# EAGLE board trill-square (EAGLE 6.5.0), part 1 of 2
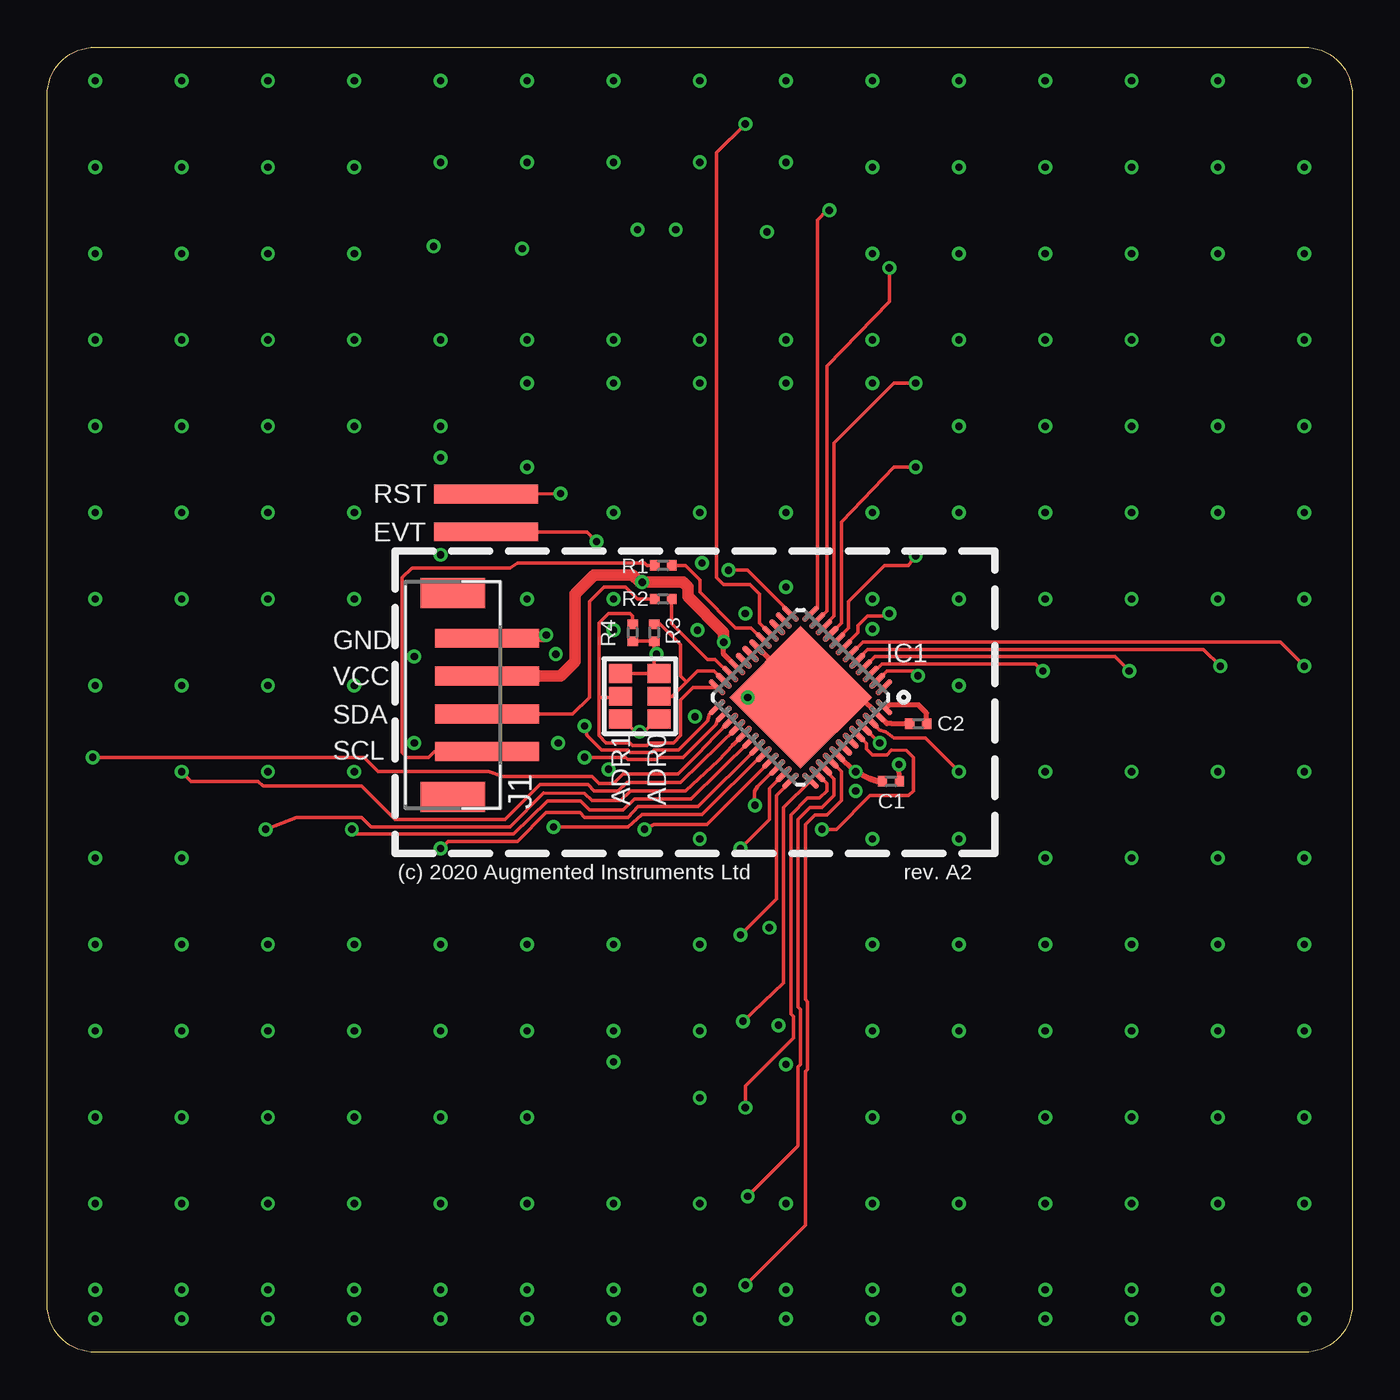
[diagram p0: board, top side]
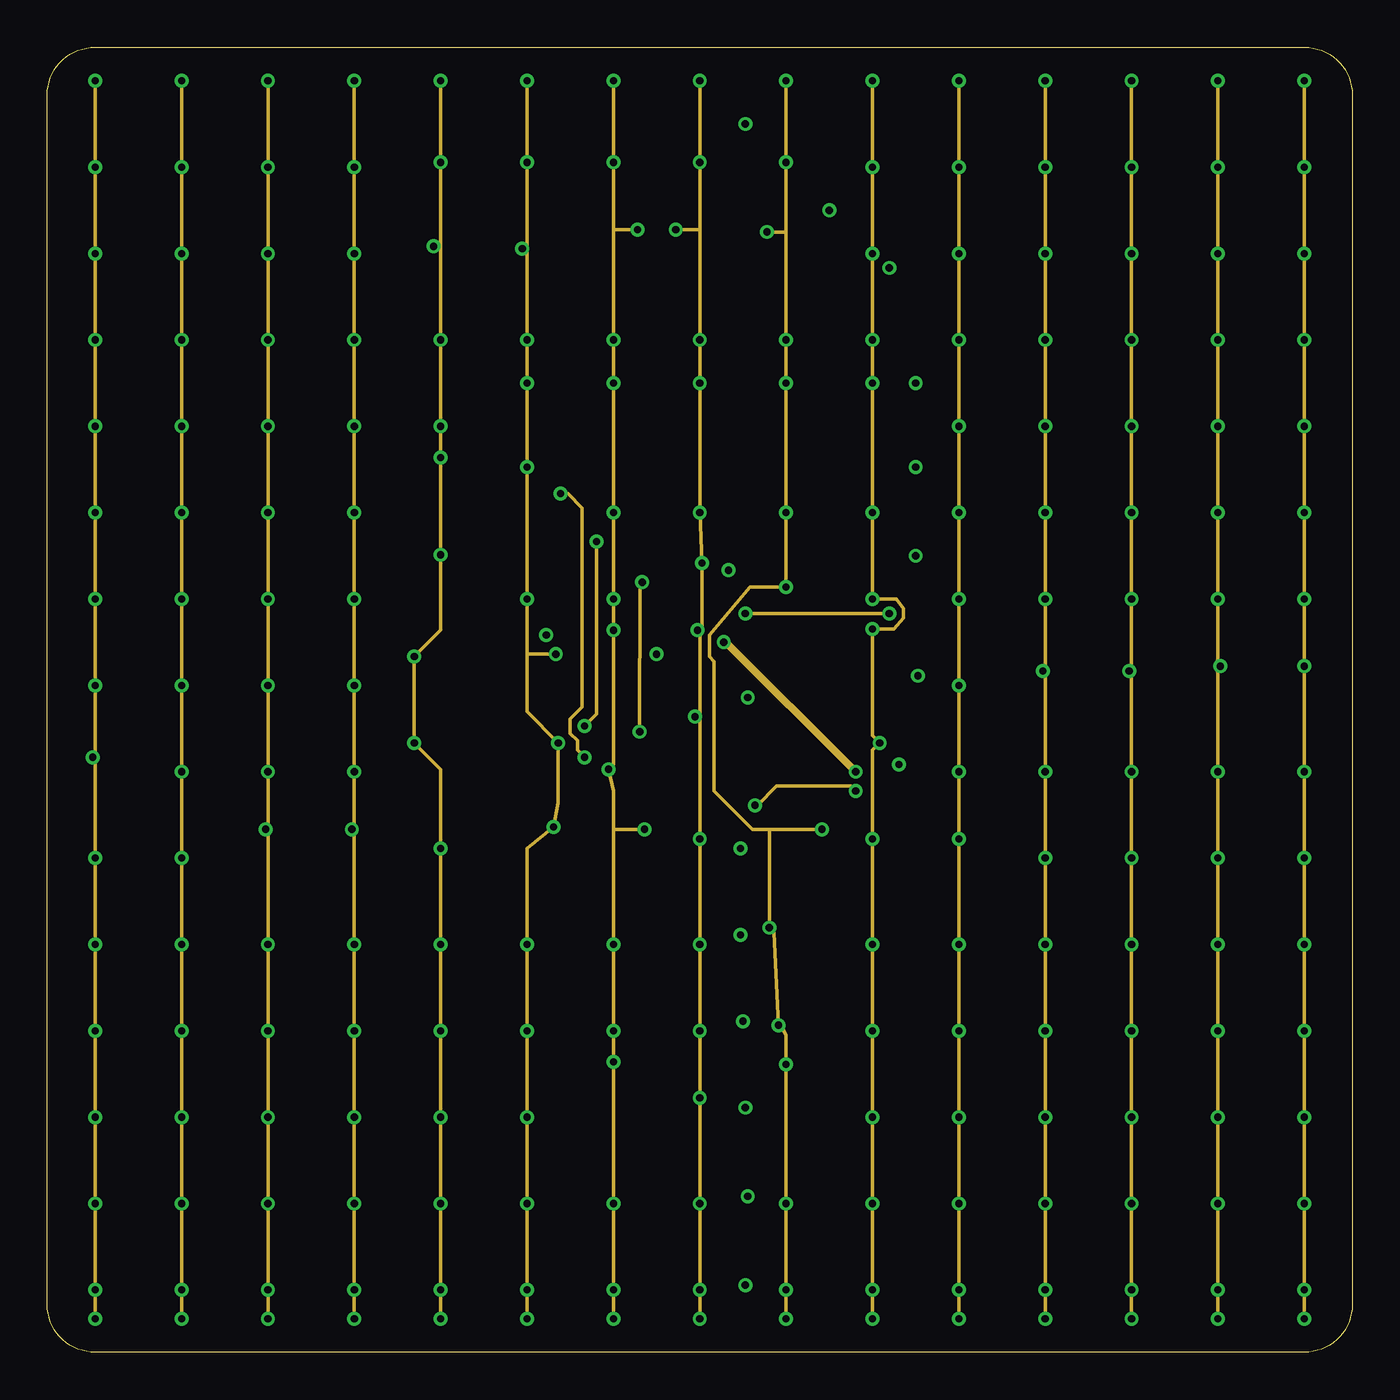
[diagram p1: board, inner layer Route2]
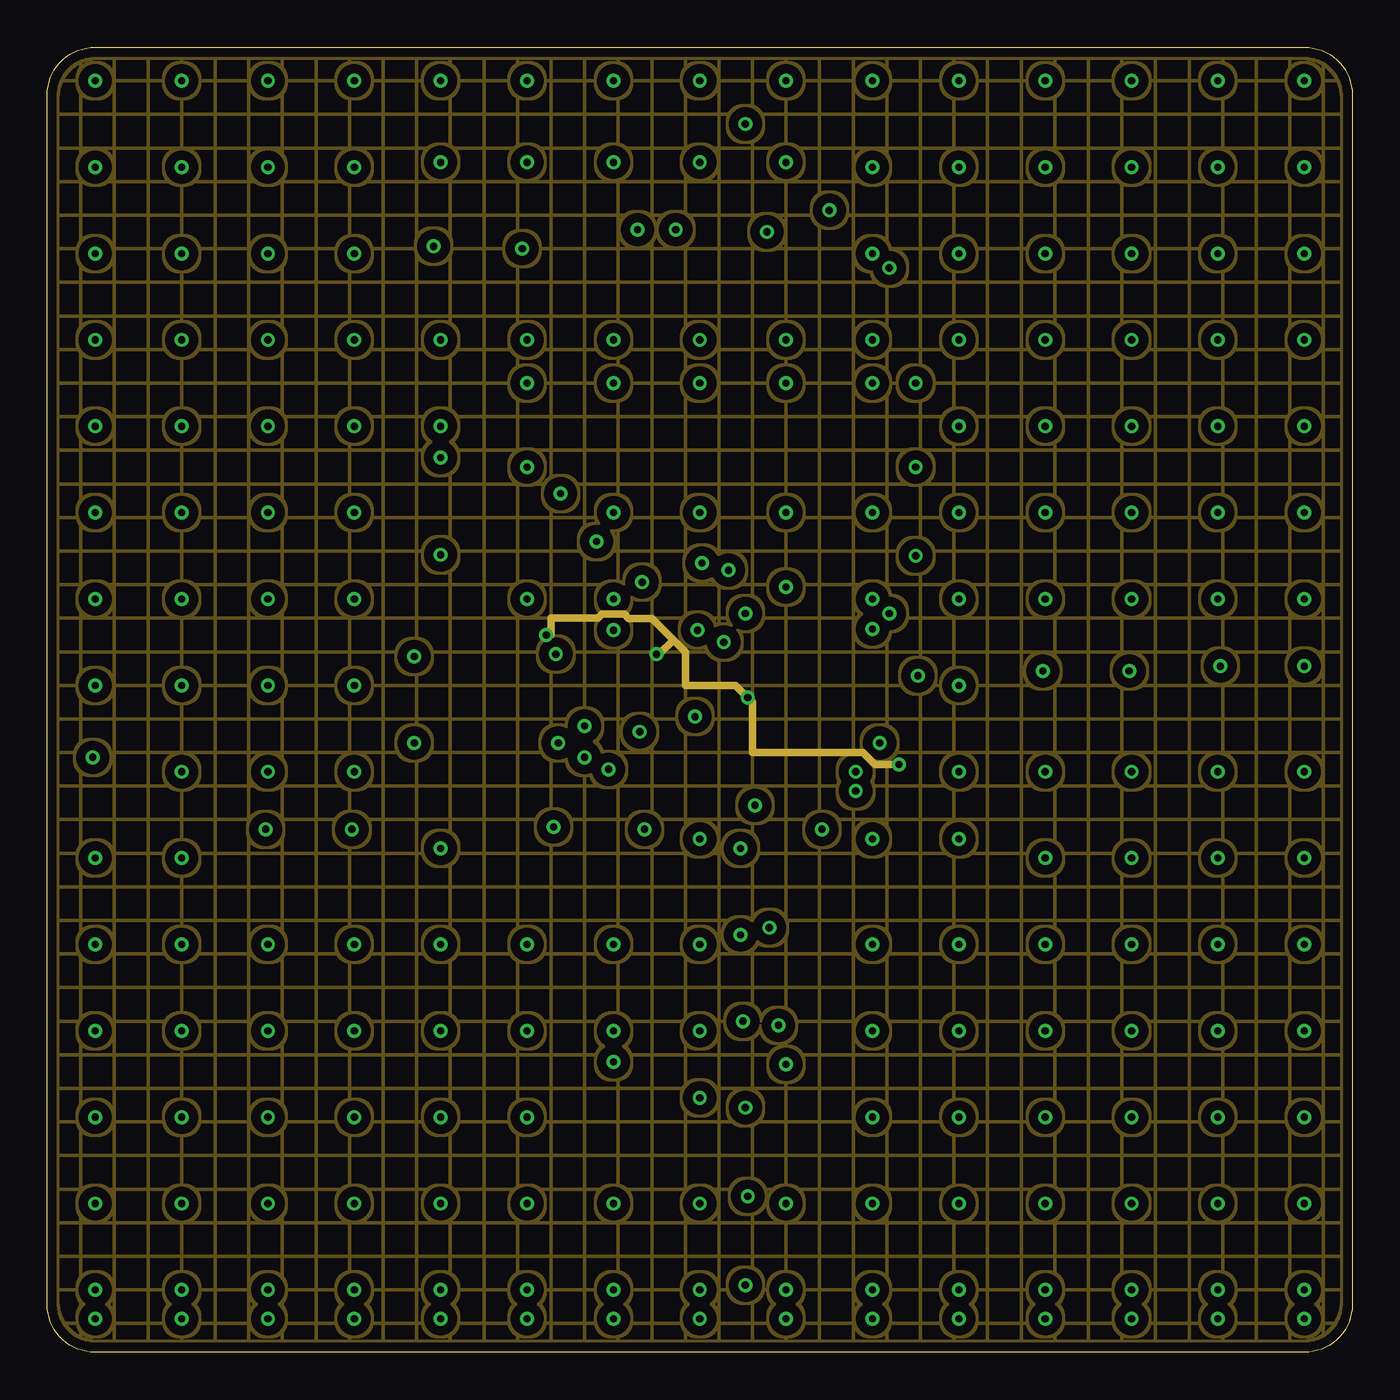
[diagram p2: board, inner layer Route3]
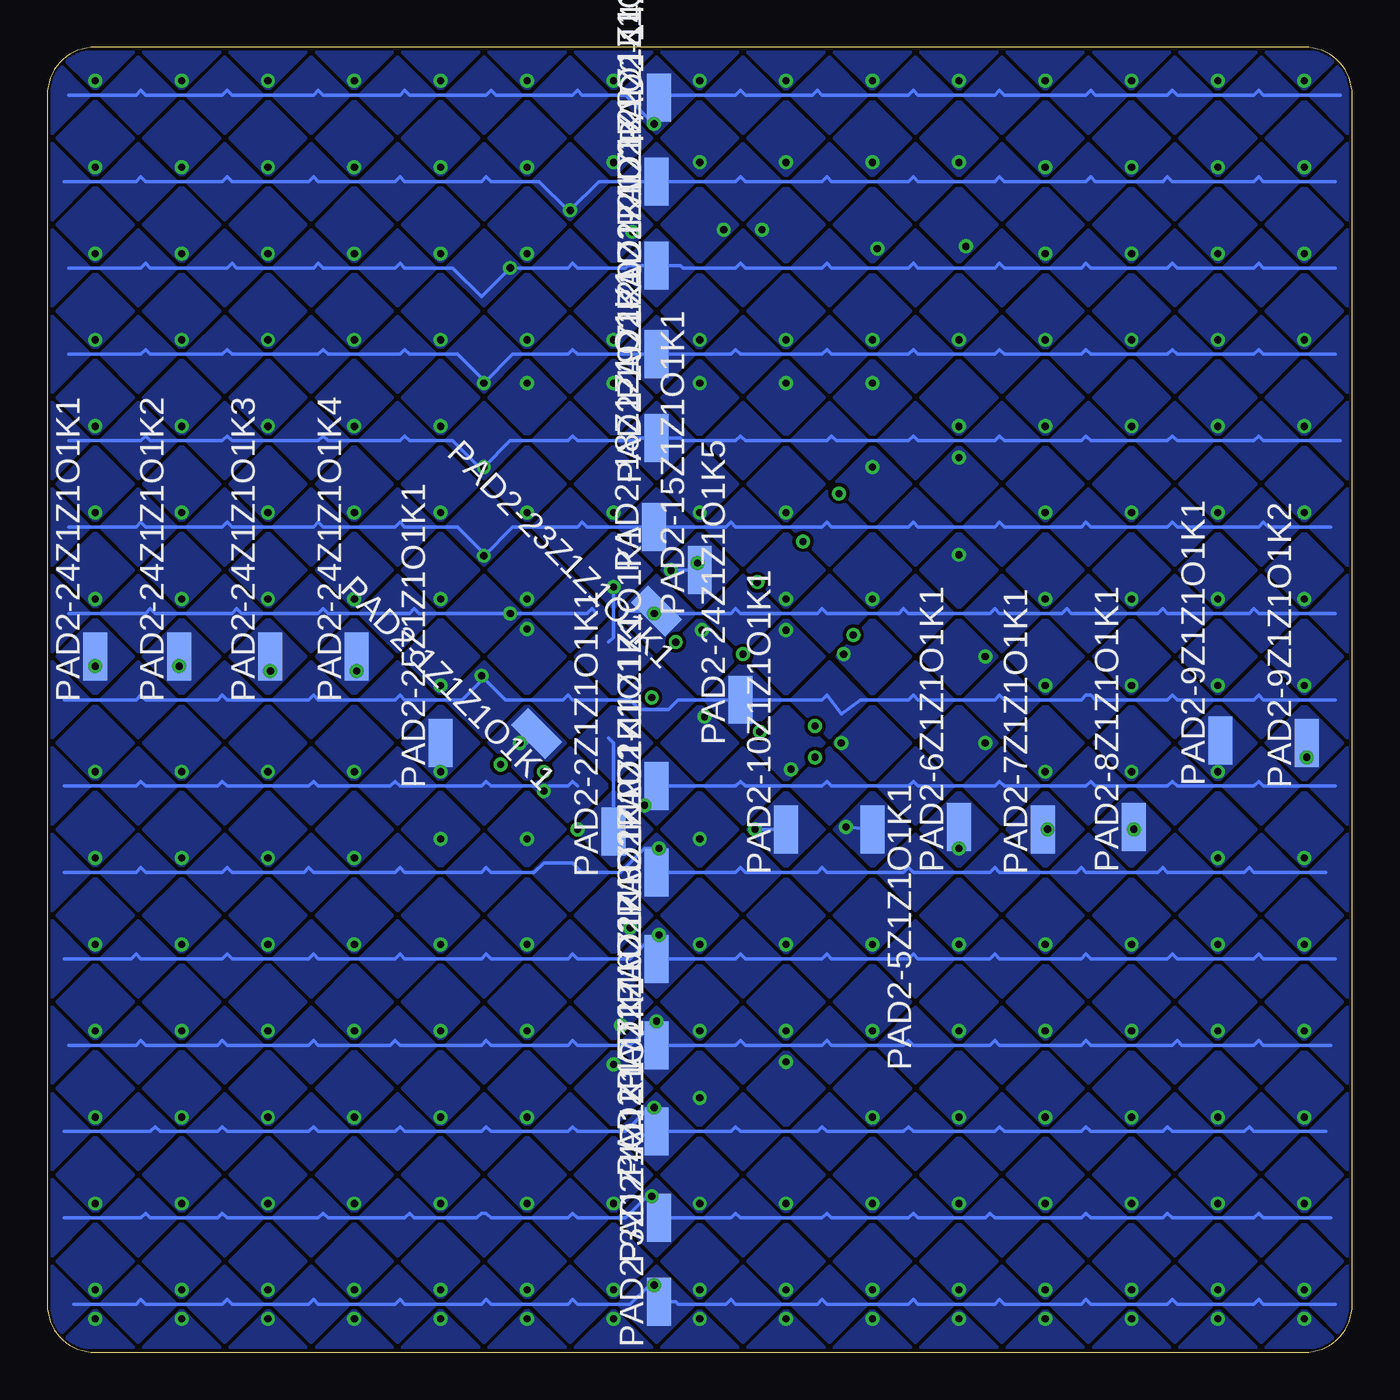
[diagram p3: board, bottom side, seen from below]

Size 69.09 x 69.09 mm. Coordinates in mm from the lower left corner, seen from the top.
Outline: 0,2.54 0,66.55 arc-90 2.54,69.09 66.55,69.09 arc-90 69.09,66.55 69.09,2.54 arc-90 66.55,0 2.54,0 arc-90 0,2.54
Copper layers (1*2*3*16): Top 0.035mm / dielectric 0.2mm / Route2 0.035mm / dielectric 1.1mm / Route3 0.035mm / dielectric 0.2mm / Bottom 0.035mm
Design rules "default *": minimum track width 7mil, minimum drill 15mil, track to track 7mil, track to pad 7mil, pad to pad 7mil, via to via 7mil, smd to smd 0mil, copper to edge 5mil, drill to drill 7mil, minimum pad ring 7mil, minimum via ring 7mil, stop-mask expansion 4mil, vias tented up to drill 20mil, thermal gap 10mil

## Footprints (pad centres in the part's own frame; a part is rotated, then mirrored left to right if it is on the bottom)
C0402-SMALL = smd 0.5 x 0.55: P$1 -0.45,0; P$2 0.45,0
QFN48-LEADS = smd 1.1 x 0.3: 1 -3.5,2.75; 2 -3.5,2.25; 3 -3.5,1.75; 4 -3.5,1.25; 5 -3.5,0.75; 6 -3.5,0.25; 7 -3.5,-0.25; 8 -3.5,-0.75; 9 -3.5,-1.25; 10 -3.5,-1.75; 11 -3.5,-2.25; 12 -3.5,-2.75; 25 3.5,-2.75; 26 3.5,-2.25; 27 3.5,-1.75; 28 3.5,-1.25; 29 3.5,-0.75; 30 3.5,-0.25; 31 3.5,0.25; 32 3.5,0.75; 33 3.5,1.25; 34 3.5,1.75; 35 3.5,2.25; 36 3.5,2.75 | smd 0.3 x 1.1: 13 -2.75,-3.5; 14 -2.25,-3.5; 15 -1.75,-3.5; 16 -1.25,-3.5; 17 -0.75,-3.5; 18 -0.25,-3.5; 19 0.25,-3.5; 20 0.75,-3.5; 21 1.25,-3.5; 22 1.75,-3.5; 23 2.25,-3.5; 24 2.75,-3.5; 37 2.75,3.5; 38 2.25,3.5; 39 1.75,3.5; 40 1.25,3.5; 41 0.75,3.5; 42 0.25,3.5; 43 -0.25,3.5; 44 -0.75,3.5; 45 -1.25,3.5; 46 -1.75,3.5; 47 -2.25,3.5; 48 -2.75,3.5 | smd 5.33 x 5.33: EXP 0,0
JST-PH-4-SMT = smd 1 x 5.5: 1 -3,-0.8; 2 -1,-0.8; 3 1,-0.8; 4 3,-0.8 | smd 1.6 x 3.4: NC1 -5.4,1; NC2 5.4,1
SMD1,27-2,54 = smd 1.27 x 2.54: 1 0,0
SOLDER_JUMPER_3PAD = smd 1 x 1.2: P$1 0,0; P$2 1.2,0; P$3 2.4,0
JST-SMT-EXTRAPAD = smd 1 x 5.5: P$1 0,0

## Placement (x,y rotation side)
C1  C0402-SMALL  [C0402-SMALL]  44.67,30.23 180 top
C2  C0402-SMALL  [C0402-SMALL]  46.1,33.27 180 top
IC1  CY8C206X6A  [QFN48-LEADS]  39.88,34.67 225 top
J1  GROVE-SMT  [JST-PH-4-SMT]  22.48,34.8 90 top
PAD2-1Z1Z1O1K1  [SMD1,27-2,54]  43.18,32.77 45 bottom
PAD2-2Z1Z1O1K1  [SMD1,27-2,54]  39.12,27.56 0 bottom
PAD2-3Z1Z1O1K1  [SMD1,27-2,54]  36.7,2.67 0 bottom
PAD2-4Z1Z1O1K1  [SMD1,27-2,54]  36.7,7.11 0 bottom
PAD2-5Z1Z1O1K1  [SMD1,27-2,54]  25.4,27.69 180 bottom
PAD2-6Z1Z1O1K1  [SMD1,27-2,54]  20.83,27.81 0 bottom
PAD2-7Z1Z1O1K1  [SMD1,27-2,54]  16.38,27.69 0 bottom
PAD2-8Z1Z1O1K1  [SMD1,27-2,54]  11.56,27.81 0 bottom
PAD2-9Z1Z1O1K1  [SMD1,27-2,54]  6.98,32.39 0 bottom
PAD2-9Z1Z1O1K2  [SMD1,27-2,54]  2.41,32.26 0 bottom
PAD2-10Z1Z1O1K1  [SMD1,27-2,54]  29.97,27.69 0 bottom
PAD2-11Z1Z1O1K1  [SMD1,27-2,54]  36.83,29.97 0 bottom
PAD2-12Z1Z1O1K1  [SMD1,27-2,54]  36.83,25.4 0 bottom
PAD2-13Z1Z1O1K1  [SMD1,27-2,54]  36.83,20.83 0 bottom
PAD2-14Z1Z1O1K1  [SMD1,27-2,54]  36.7,66.42 0 bottom
PAD2-15Z1Z1O1K1  [SMD1,27-2,54]  34.54,41.4 0 bottom
PAD2-16Z1Z1O1K1  [SMD1,27-2,54]  36.83,16.26 0 bottom
PAD2-17Z1Z1O1K1  [SMD1,27-2,54]  36.83,11.68 0 bottom
PAD2-18Z1Z1O1K1  [SMD1,27-2,54]  36.96,43.69 0 bottom
PAD2-19Z1Z1O1K1  [SMD1,27-2,54]  36.83,48.39 0 bottom
PAD2-20Z1Z1O1K1  [SMD1,27-2,54]  36.83,52.83 0 bottom
PAD2-21Z1Z1O1K1  [SMD1,27-2,54]  36.83,57.53 0 bottom
PAD2-22Z1Z1O1K1  [SMD1,27-2,54]  36.83,61.98 0 bottom
PAD2-23Z1Z1O1K1  [SMD1,27-2,54]  36.83,39.24 45 bottom
PAD2-24Z1Z1O1K1  [SMD1,27-2,54]  66.55,36.83 0 bottom
PAD2-24Z1Z1O1K2  [SMD1,27-2,54]  62.1,36.83 0 bottom
PAD2-24Z1Z1O1K3  [SMD1,27-2,54]  57.28,36.83 0 bottom
PAD2-24Z1Z1O1K4  [SMD1,27-2,54]  52.71,36.83 0 bottom
PAD2-24Z1Z1O1K5  [SMD1,27-2,54]  32.39,34.54 0 bottom
PAD2-25Z1Z1O1K1  [SMD1,27-2,54]  48.26,32.26 0 bottom
R1  R0402-SMALL  [C0402-SMALL]  32.6,41.66 180 top
R2  R0402-SMALL  [C0402-SMALL]  32.6,39.88 180 top
R3  R0402-SMALL  [C0402-SMALL]  32.13,38.1 90 top
R4  R0402-SMALL  [C0402-SMALL]  30.99,38.1 90 top
U$7  SOLDER_JUMPER_3PAD  [SOLDER_JUMPER_3PAD]  32.39,33.53 90 top
U$8  SOLDER_JUMPER_3PAD  [SOLDER_JUMPER_3PAD]  30.35,33.53 90 top
U$11  JST-SMT-EXTRAPAD  [JST-SMT-EXTRAPAD]  23.24,43.43 90 top
U$12  JST-SMT-EXTRAPAD  [JST-SMT-EXTRAPAD]  23.24,45.43 90 top

## Library data of the parts
C1 C2 IC1 J1 PAD2-1Z1Z1O1K1 PAD2-2Z1Z1O1K1 PAD2-3Z1Z1O1K1 PAD2-4Z1Z1O1K1 PAD2-5Z1Z1O1K1 PAD2-6Z1Z1O1K1 PAD2-7Z1Z1O1K1 PAD2-8Z1Z1O1K1 PAD2-9Z1Z1O1K1 PAD2-9Z1Z1O1K2 PAD2-10Z1Z1O1K1 PAD2-11Z1Z1O1K1 PAD2-12Z1Z1O1K1 PAD2-13Z1Z1O1K1 PAD2-14Z1Z1O1K1 PAD2-15Z1Z1O1K1 PAD2-16Z1Z1O1K1 PAD2-17Z1Z1O1K1 PAD2-18Z1Z1O1K1 PAD2-19Z1Z1O1K1 PAD2-20Z1Z1O1K1 PAD2-21Z1Z1O1K1 PAD2-22Z1Z1O1K1 PAD2-23Z1Z1O1K1 PAD2-24Z1Z1O1K1-PAD2-24Z1Z1O1K5 PAD2-25Z1Z1O1K1 R1-R4 U$7 U$8 U$11 U$12 = custom

## Nets
ADDR0: IC1.23 R3.P$2 U$7.P$2
ADDR1: IC1.24 R4.P$2 U$8.P$2
COL1: IC1.27 PAD2-9Z1Z1O1K2.1
COL2: IC1.28 PAD2-9Z1Z1O1K1.1
COL3: IC1.29 PAD2-8Z1Z1O1K1.1
COL4: IC1.30 PAD2-7Z1Z1O1K1.1
COL5: IC1.31 PAD2-6Z1Z1O1K1.1
COL6: IC1.32 PAD2-5Z1Z1O1K1.1
COL7: IC1.33 PAD2-10Z1Z1O1K1.1
COL8: IC1.13 PAD2-15Z1Z1O1K1.1
COL9: IC1.44 PAD2-2Z1Z1O1K1.1
COL10: IC1.45 PAD2-1Z1Z1O1K1.1
COL11: IC1.46 PAD2-25Z1Z1O1K1.1
COL12: IC1.3 PAD2-24Z1Z1O1K4.1
COL13: IC1.4 PAD2-24Z1Z1O1K3.1
COL14: IC1.5 PAD2-24Z1Z1O1K2.1
COL15: IC1.6 PAD2-24Z1Z1O1K1.1
EVENT: IC1.25 U$11.P$1
GND: C1.P$1 C2.P$2 IC1.18 IC1.47 IC1.EXP J1.4 R3.P$1 R4.P$1 U$7.P$3 U$8.P$3
I2C_SCL: J1.1 R1.P$2
I2C_SDA: J1.2 R2.P$2
N$3: C2.P$1 IC1.48
N$71Z1Z1O1K1: IC1.17 R1.P$1
N$72Z1Z1O1K1: IC1.22 R2.P$1
ROW1: IC1.16 PAD2-14Z1Z1O1K1.1
ROW2: IC1.12 PAD2-22Z1Z1O1K1.1
ROW3: IC1.11 PAD2-21Z1Z1O1K1.1
ROW4: IC1.10 PAD2-20Z1Z1O1K1.1
ROW5: IC1.9 PAD2-19Z1Z1O1K1.1
ROW6: IC1.8 PAD2-18Z1Z1O1K1.1
ROW7: IC1.7 PAD2-23Z1Z1O1K1.1
ROW8: IC1.2 PAD2-24Z1Z1O1K5.1
ROW9: IC1.34 PAD2-11Z1Z1O1K1.1
ROW10: IC1.35 PAD2-12Z1Z1O1K1.1
ROW11: IC1.36 PAD2-13Z1Z1O1K1.1
ROW12: IC1.37 PAD2-16Z1Z1O1K1.1
ROW13: IC1.38 PAD2-17Z1Z1O1K1.1
ROW14: IC1.39 PAD2-4Z1Z1O1K1.1
ROW15: IC1.40 PAD2-3Z1Z1O1K1.1
VCC: C1.P$2 IC1.21 IC1.41 J1.3 U$7.P$1 U$8.P$1
XRES: IC1.26 U$12.P$1